# Altium PCB MAIN.PcbDoc
Units mil, origin at the board's own origin, x right, y up, seen from the top; angles counter-clockwise.
Board outline 3248.03 x 2755.91 mil, 2 copper layers (Top Layer, Bottom Layer); 64 components, 65 nets, 317 pads, 0 vias.
Unrouted connection lines stored in the file: 152.
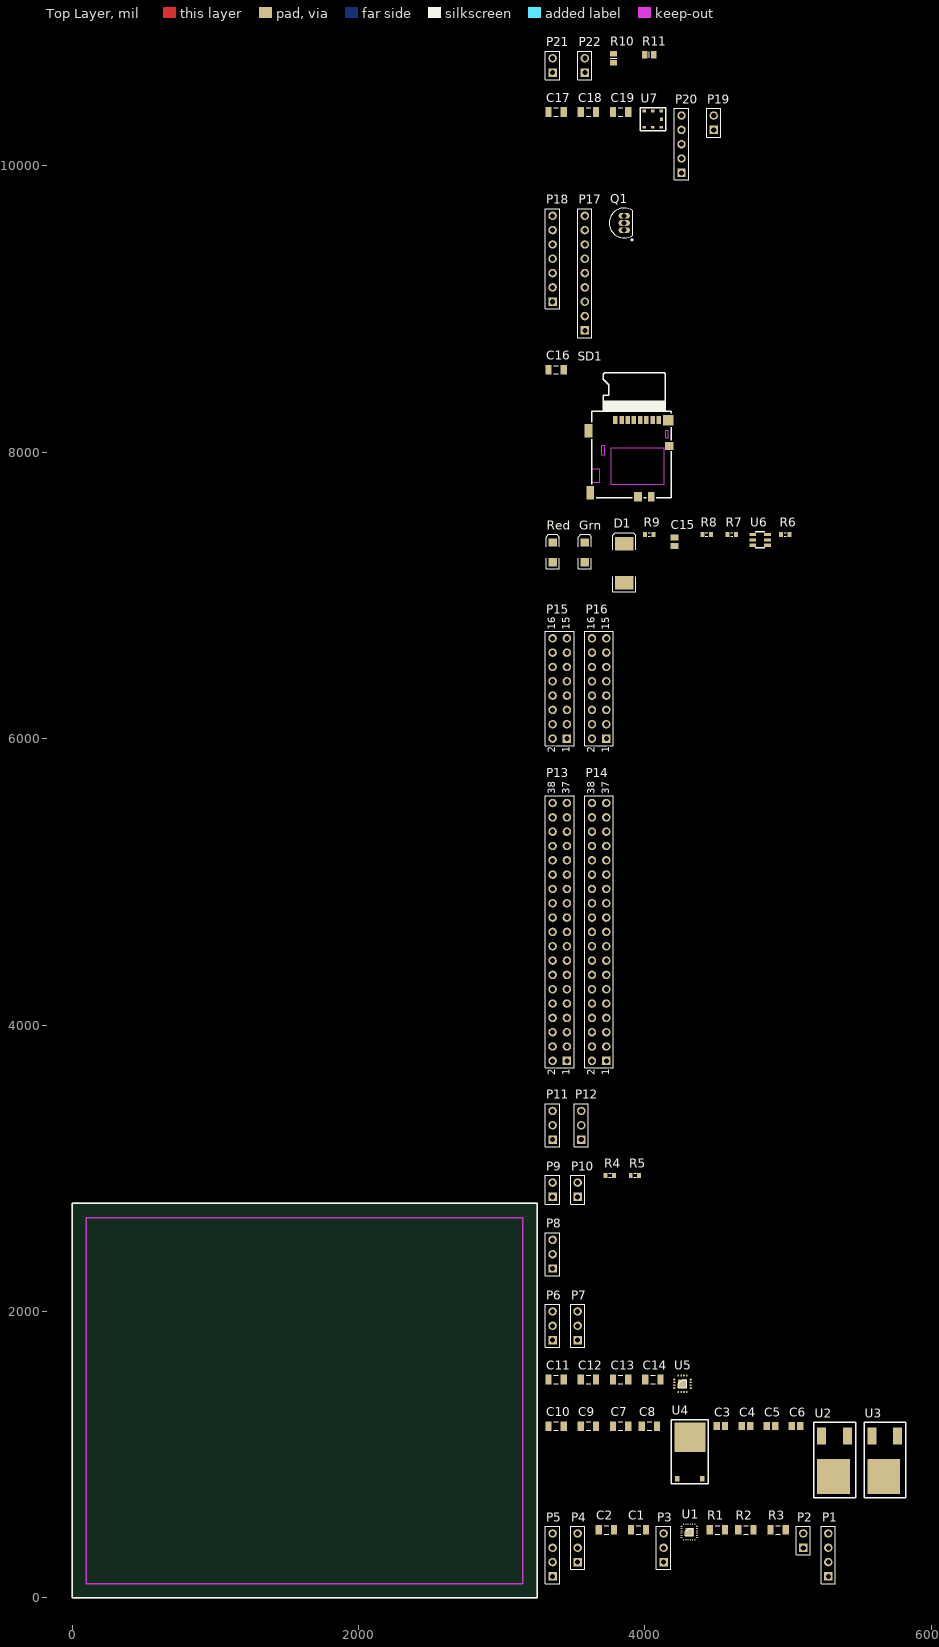
[diagram p0: Top Layer view]
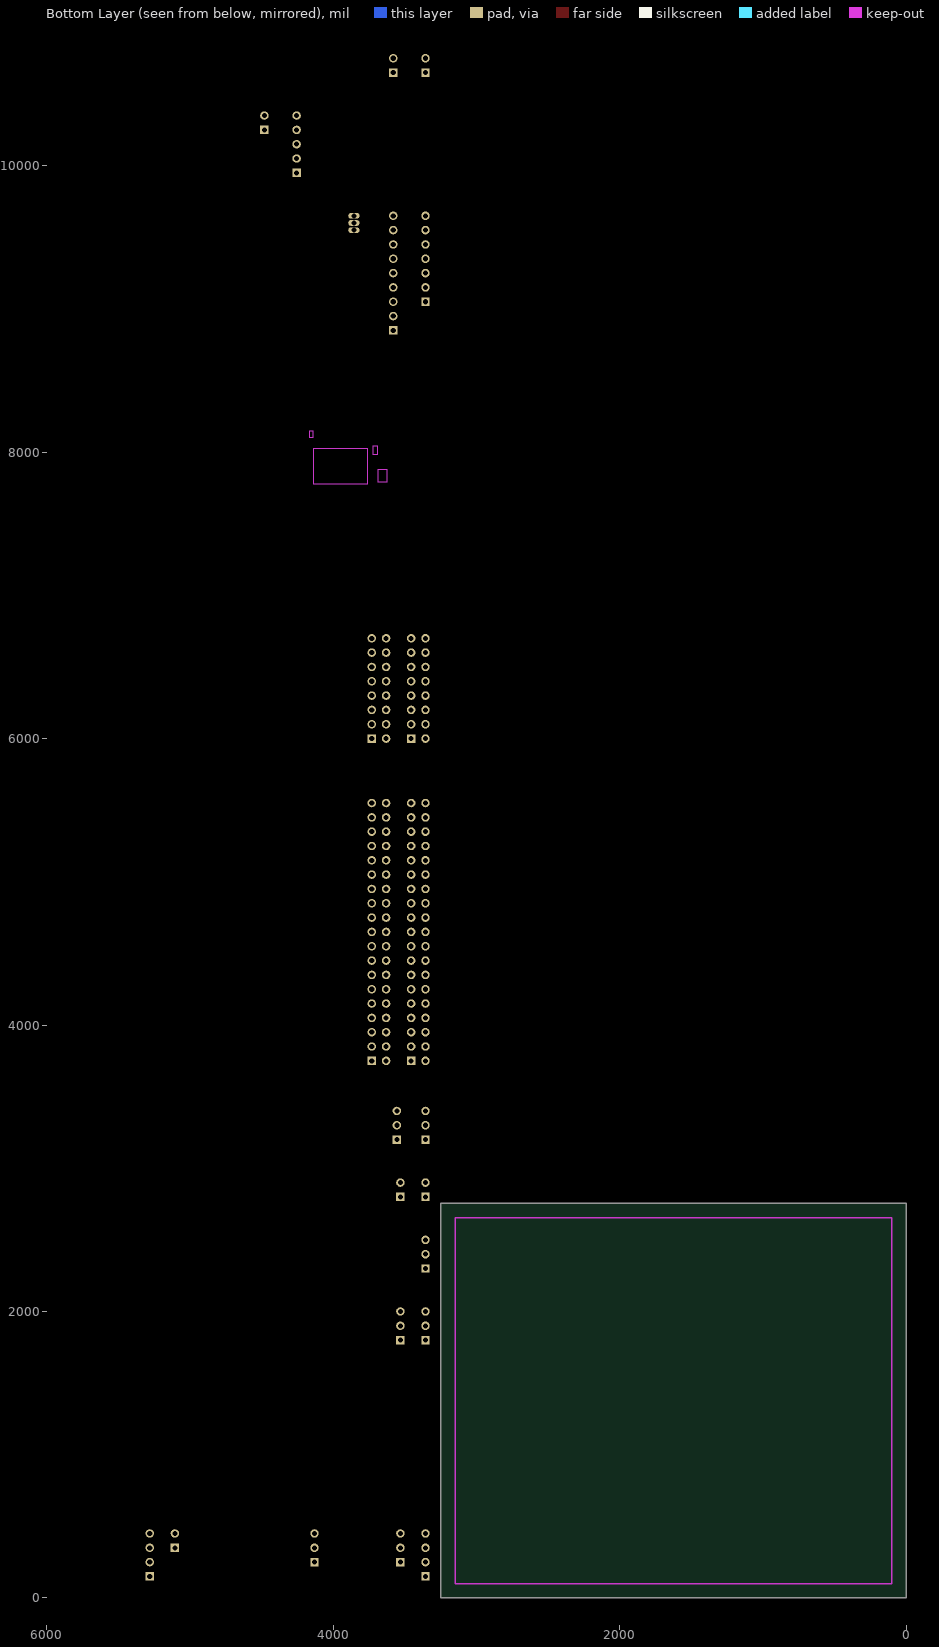
[diagram p1: Bottom Layer view, seen from below]

## Layer stack, top to bottom
Top Solder: solder mask 0.4, Solder Resist, Dk 3.5
Top Layer: signal copper 1.4
Dielectric1: dielectric 12.6, FR-4, Dk 4.8
Bottom Layer: signal copper 1.4
Bottom Solder: solder mask 0.4, Solder Resist, Dk 3.5

## Board outline
0,0 3248.03,0 3248.03,2755.91 0,2755.91

## Design rules (kind name [scope] priority, off if disabled: settings)
Clearance [All] p1: gap=10
PolygonConnect [All] p1: connectstyle=Relief reliefconductorwidth=10 reliefentries=4 polygonreliefangle="90 Angle" airgapwidth=10
RoomDefinition Thermistors [InComponentClass('Thermistors')] p1: confinementstyle=ConfineIn formatcopy=TRUE lockcomponents=FALSE outline 3280,10575 4130,10575 4130,10925 3280,10925
RoomDefinition Temp_Pressure [InComponentClass('Temp_Pressure')] p2: confinementstyle=ConfineIn formatcopy=TRUE lockcomponents=FALSE outline 3280,9875 4605,9875 4605,10525 3280,10525
RoomDefinition Telemetry-Power [InComponentClass('Telemetry-Power')] p3: confinementstyle=ConfineIn formatcopy=TRUE lockcomponents=FALSE outline 3280,8775 3930,8775 3930,9825 3280,9825
RoomDefinition RSX11_SDCard [InComponentClass('RSX11_SDCard')] p4: confinementstyle=ConfineIn formatcopy=TRUE lockcomponents=FALSE outline 3280,7600 4280,7600 4280,8725 3280,8725
RoomDefinition RS232_Level_Shifter [InComponentClass('RS232_Level_Shifter')] p5: confinementstyle=ConfineIn formatcopy=TRUE lockcomponents=FALSE outline 3280,7000 5080,7000 5080,7575 3280,7575
RoomDefinition OV7670s [InComponentClass('OV7670s')] p6: confinementstyle=ConfineIn formatcopy=TRUE lockcomponents=FALSE outline 3280,5875 3805,5875 3805,6950 3280,6950
RoomDefinition Nucleo [InComponentClass('Nucleo')] p7: confinementstyle=ConfineIn formatcopy=TRUE lockcomponents=FALSE outline 3280,3625 3805,3625 3805,5825 3280,5825
RoomDefinition Linear_Actuators [InComponentClass('Linear_Actuators')] p8: confinementstyle=ConfineIn formatcopy=TRUE lockcomponents=FALSE outline 3280,3125 3680,3125 3680,3575 3280,3575
RoomDefinition LEDs [InComponentClass('LEDs')] p9: confinementstyle=ConfineIn formatcopy=TRUE lockcomponents=FALSE outline 3280,2725 4030,2725 4030,3100 3280,3100
RoomDefinition Humidity_Sensor [InComponentClass('Humidity_Sensor')] p10: confinementstyle=ConfineIn formatcopy=TRUE lockcomponents=FALSE outline 3280,2225 3430,2225 3430,2675 3280,2675
RoomDefinition GoPros [InComponentClass('GoPros')] p11: confinementstyle=ConfineIn formatcopy=TRUE lockcomponents=FALSE outline 3280,1725 3605,1725 3605,2175 3280,2175
RoomDefinition enviroAccelerometer [InComponentClass('enviroAccelerometer')] p12: confinementstyle=ConfineIn formatcopy=TRUE lockcomponents=FALSE outline 3280,1400 4355,1400 4355,1675 3280,1675
RoomDefinition Buck_Converters [InComponentClass('Buck_Converters')] p13: confinementstyle=ConfineIn formatcopy=TRUE lockcomponents=FALSE outline 3280,675 5830,675 5830,1375 3280,1375
RoomDefinition BoomIMU_Sensor [InComponentClass('BoomIMU_Sensor')] p14: confinementstyle=ConfineIn formatcopy=TRUE lockcomponents=FALSE outline 3280,75 5355,75 5355,650 3280,650
RoutingVias [All] p1: holewidth=28 width=50 viastyle="Through Hole" minholewidth=28 minwidth=50 maxholewidth=28 maxwidth=50
SilkToSolderMaskClearance SilkscreenOverComponentPads [IsPad] p1: minsilkscreentomaskgap=10 clearancetoexposedcopper=TRUE
SolderMaskExpansion [All] p1: expansion=4
UnpouredPolygon [All] p1: allowunpoured=FALSE
Width [All] p1: maxlimit=10 minlimit=10 preferedwidth=10
28 further rules are at their usual default settings.

## Classes and differential pairs
component class Thermistors: P21 P22 R10 R11
component class Temp_Pressure: C17 C18 C19 P19 P20 U7
component class Telemetry-Power: P17 P18 Q1
component class RSX11_SDCard: C16 SD1
component class RS232_Level_Shifter: C15 D1 Grn R6 R7 R8 R9 Red U6
component class OV7670s: P15 P16
component class Nucleo: P13 P14
component class Linear_Actuators: P11 P12
component class LEDs: P9 P10 R4 R5
component class Humidity_Sensor: P8
component class GoPros: P6 P7
component class enviroAccelerometer: C11 C12 C13 C14 U5
component class Buck_Converters: C3 C4 C5 C6 C7 C8 C9 C10 U2 U3 U4
component class BoomIMU_Sensor: C1 C2 P1 P2 P3 P4 P5 R1 R2 R3 U1

## Components (designator, comment, footprint, x,y, rotation, side; value= is the part's Value field where it differs from the comment)
C1 "Cap" C1206 3955,475 r0 top
C2 "Cap" C1206 3730,475 r0 top
C3 "Cap" C0805 4530,1200 r0 top
C4 "Cap" C0805 4705,1200 r0 top
C5 "Cap" C0805 4880,1200 r0 top
C6 "Cap" C0805 5055,1200 r0 top
C7 "Cap Semi" C1206 3830,1200 r0 top
C8 "Cap Semi" C1206 4030,1200 r0 top
C9 "Cap Semi" C1206 3605,1200 r0 top
C10 "Cap Semi" C1206 3380,1200 r0 top
C11 "Cap Semi" C1206 3380,1525 r0 top
C12 "Cap Semi" C1206 3605,1525 r0 top
C13 "Cap Semi" C1206 3830,1525 r0 top
C14 "Cap Semi" C1206 4055,1525 r0 top
C15 "Cap Pol3" C0805 4205,7375 r90 top
C16 "Cap" C1206 3380,8575 r0 top
C17 "Cap Semi" C1206 3380,10375 r0 top
C18 "Cap Semi" C1206 3605,10375 r0 top
C19 "Cap Semi" C1206 3830,10375 r0 top
D1 "BAS16" SMC 3855,7225 r90 top
Grn "LED2" 3.2X1.6X1.1 3580,7300 r90 top
P1 "J1" HDR1X4 5280,150 r90 top
P2 "SJ1" HDR1X2 5105,350 r90 top
P3 "J2" HDR1X3 4130,250 r90 top
P4 "Header 3" HDR1X3 3530,250 r90 top
P5 "J3" HDR1X4 3355,150 r90 top
P6 "GoPro 1" HDR1X3 3355,1800 r90 top
P7 "GoPro 2" HDR1X3 3530,1800 r90 top
P8 "Header 3" HDR1X3 3355,2300 r90 top
P9 "LED_Ext" HDR1X2 3355,2800 r90 top
P10 "LED_Int" HDR1X2 3530,2800 r90 top
P11 "Front Actuator" HDR1X3 3355,3200 r90 top
P12 "Back Actuator" HDR1X3 3555,3200 r90 top
P13 "Nucleo LHS" HDR2X19 3455,3750 r90 top
P14 "Nucleo RHS" HDR2X19 3730,3750 r90 top
P15 "OV7670" HDR2X8 3455,6000 r90 top
P16 "OV7670" HDR2X8 3730,6000 r90 top
P17 "RS Telemetry" HDR1X9 3580,8850 r90 top
P18 "RS Power" HDR1X7 3355,9050 r90 top
P19 "Header 2" HDR1X2 4480,10250 r90 top
P20 "Temp-Press_CameraBox" HDR1X5 4255,9950 r90 top
P21 "Thermistor" HDR1X2 3355,10650 r90 top
P22 "Thermistor" HDR1X2 3580,10650 r90 top
Q1 "Transistor" TO-226-AA 3855,9600 r0 top
R1 "Res1" C1206 4505,475 r0 top
R2 "Res1" C1206 4705,475 r0 top
R3 "Res1" C1206 4930,475 r0 top
R4 "Res3" J1-0603 3755,2950 r0 top
R5 "Res3" J1-0603 3930,2950 r0 top
R6 "Res3" J1-0603 4980,7425 r0 top
R7 "Res3" J1-0603 4605,7425 r0 top
R8 "Res3" J1-0603 4430,7425 r0 top
R9 "Res3" J1-0603 4030,7425 r0 top
R10 "Res3" 6-0805_L 3780,10750 r90 top
R11 "Res3" 6-0805_L 4030,10775 r0 top
Red "LED2" 3.2X1.6X1.1 3355,7300 r90 top
SD1 "uSD-PJS008-2130-0" microSD_push-push 3880,8225 r90 top
U1 "MPU-9250" MPU-9250 4255,500 r0 top
U2 "DPAK-3" DPAK-3 5430,725 r90 top
U3 "DPAK-3" DPAK-3 5780,725 r90 top
U4 "REG_IFX" Reg_IFX 4205,1225 r0 top
U5 "ADXL377" ADXL377 4205,1525 r0 top
U6 "RS232" rs232 4855,7425 r0 top
U7 "BMP180" BMP180 4055,10325 r0 top

## Footprints (in the part's own frame and the unit in brackets; to place one, negate y for a bottom-side part, rotate by r counter-clockwise, add the part's x,y. Pads: shape width x height; smd on the part's side, far side on the other; paste and mask are expansions set on the pad)
3.2X1.6X1.1 [mm] "SMT LED; 2 Flat Leads"
  rect 1.5x1.5 smd: 1(-1.75,0) 2(1.75,0)
  silkscreen extent -2.9,-1.15 3.2,1.15
6-0805_L [mm] "Chip Resistor, Body 2.0x1.2mm, IPC High Density"
  rect 1x1.3 smd: 1(-0.8,0) 2(0.8,0)
  silkscreen extent 0,-0.55 0,0.55, body extent -1.07,-0.7 1.07,0.7, height 0.7
ADXL377 [mm]
  oval 0.4x0.3 smd: 1(0,0) 2(0,-0.5) 3(0,-1) 4(0,-1.5) 9(2.9,-1.5) 10(2.9,-1) 11(2.9,-0.5) 12(2.9,0)
  oval 0.3x0.4 smd: 5(0.7,-2.2) 6(1.2,-2.2) 7(1.7,-2.2) 8(2.2,-2.2) 13(2.2,0.7) 14(1.7,0.7) 15(1.2,0.7) 16(0.7,0.7)
  rect 1.524x1.524 smd: ""(1.45,-0.749)
  silkscreen extent 0.73,-1.46 2.16,-0.03
BMP180 [mm]
  rect 0.6x0.5 smd: 1(1.5,-1.45) 2(0,-1.45) 3(-1.55,-1.45) 4(-1.5,1.45) 5(0,1.45) 6(1.5,1.45)
  rect 0.5x0.6 smd: 7(1.55,0)
  silkscreen extent -2.25,-2.05 2.25,2
C0805 [mm] "Chip Capacitor, Body 2.0x1.3mm, IPC High Density"
  rect 1.1x1.4 smd: 1(-0.75,0) 2(0.75,0)
  body extent -1.1,-0.72 1.1,0.72, height 1.4
C1206 [mm] "Chip Capacitor, Body 3.2x1.6mm, IPC High Density"
  rect 1.1x1.7 smd: 1(-1.35,0) 2(1.35,0)
  silkscreen extent -0.4,-0.75 0.4,0.75, body extent -1.7,-0.9 1.7,0.9, height 1.3
DPAK-3 [mil]
  rect 118x63 smd: 1(405,16.5) 3(405,196.5)
  rect 244x228 smd: 2(122,114)
  silkscreen extent -25,-40 500,250
HDR1X2 [mm] "Connector; Header; 2 Position"
  rect 1.5x1.5 hole 0.9: 1(0,0)
  round 1.5 hole 0.9: 2(2.54,0)
  silkscreen extent -1.27,-1.27 3.81,1.27
HDR1X3 [mm] "Connector; Header; 3 Position"
  rect 1.5x1.5 hole 0.9: 1(0,0)
  round 1.5 hole 0.9: 2(2.54,0) 3(5.08,0)
  silkscreen extent -1.27,-1.27 6.35,1.27
HDR1X4 [mm] "Connector; Header; 4 Position"
  rect 1.5x1.5 hole 0.9: 1(0,0)
  round 1.5 hole 0.9: 2(2.54,0) 3(5.08,0) 4(7.62,0)
  silkscreen extent -1.27,-1.27 8.89,1.27
HDR1X5 [mm] "Connector; Header; 5 Position"
  rect 1.5x1.5 hole 0.9: 1(0,0)
  round 1.5 hole 0.9: 2(2.54,0) 3(5.08,0) 4(7.62,0) 5(10.16,0)
  silkscreen extent -1.27,-1.27 11.43,1.27
HDR1X7 [mm] "Connector; Header; 7 Position"
  rect 1.5x1.5 hole 0.9: 1(0,0)
  round 1.5 hole 0.9: 2(2.54,0) 3(5.08,0) 4(7.62,0) 5(10.16,0) 6(12.7,0) 7(15.24,0)
  silkscreen extent -1.27,-1.27 16.51,1.27
HDR1X9 [mm] "Connector; Header; 9 Position"
  rect 1.5x1.5 hole 0.9: 1(0,0)
  round 1.5 hole 0.9: 2(2.54,0) 3(5.08,0) 4(7.62,0) 5(10.16,0) 6(12.7,0) 7(15.24,0) 8(17.78,0) 9(20.32,0)
  silkscreen extent -1.27,-1.27 21.59,1.27
HDR2X8 [mm] "Connector; Header; 8x2 Position"
  rect 1.5x1.5 hole 0.9: 1(0,0)
  round 1.5 hole 0.9: 2(0,2.54) 3(2.54,0) 4(2.54,2.54) 5(5.08,0) 6(5.08,2.54) 7(7.62,0) 8(7.62,2.54) 9(10.16,0) 10(10.16,2.54) 11(12.7,0) 12(12.7,2.54) 13(15.24,0) 14(15.24,2.54) 15(17.78,0) 16(17.78,2.54)
  silkscreen extent -1.27,-1.27 19.05,3.81
HDR2X19 [mm] "Connector; Header; 19x2 Position"
  rect 1.5x1.5 hole 0.9: 1(0,0)
  round 1.5 hole 0.9: 2(0,2.54) 3(2.54,0) 4(2.54,2.54) 5(5.08,0) 6(5.08,2.54) 7(7.62,0) 8(7.62,2.54) 9(10.16,0) 10(10.16,2.54) 11(12.7,0) 12(12.7,2.54) 13(15.24,0) 14(15.24,2.54) 15(17.78,0) 16(17.78,2.54) 17(20.32,0) 18(20.32,2.54) 19(22.86,0) 20(22.86,2.54) 21(25.4,0) 22(25.4,2.54) 23(27.94,0) 24(27.94,2.54) 25(30.48,0) 26(30.48,2.54) 27(33.02,0) 28(33.02,2.54) 29(35.56,0) 30(35.56,2.54) 31(38.1,0) 32(38.1,2.54) 33(40.64,0) 34(40.64,2.54) 35(43.18,0) 36(43.18,2.54) 37(45.72,0) 38(45.72,2.54)
  silkscreen extent -1.27,-1.27 46.99,3.81
J1-0603 [mm] "Chip Resistor, Body 1.6x0.8mm, IPC High Density"
  rect 0.7x0.9 smd: 1(-0.75,0) 2(0.75,0)
  silkscreen extent -0.2,-0.35 0.2,0.35, body extent -0.85,-0.48 0.85,0.48, height 0.9
microSD_push-push [mm]
  rect 1.4x0.8 smd: 1(0,2.2) 2(0,1.1) 3(0,0) 4(0,-1.1) 5(0,-2.2) 6(0,-3.3) 7(0,-4.4) 8(0,-5.5)
  rect 1.72x1.4 smd: 9(-13.651,-1.8)
  rect 2.4x1.4 smd: 9(-12.901,6.65) 9(-1.9,6.95)
  rect 1.9x1.9 smd: 9(-0.05,-7.175)
  rect 1.4x1.5 smd: 10(-4.6,-7.375)
  rect 1.72x1.1 smd: 11(-13.651,-4.15)
  Keep-Out Layer region: -3.2,-7.15 -1.9,-7.15 -1.9,-6.65 -3.2,-6.65
  Keep-Out Layer region: -6.2,4.05 -4.6,4.05 -4.6,4.75 -6.2,4.75
  Keep-Out Layer region: -11.05,4.95 -8.75,4.95 -8.75,6.45 -11.05,6.45
  Keep-Out Layer region: -11.4,-6.45 -5,-6.45 -5,3.05 -11.4,3.05
  silkscreen extent -13.83,-7.67 8.35,6.43, body extent -13.85,-7.67 8.3,6.4, height 1.55
MPU-9250 [mm]
  oval 0.3x0.2 smd: 1(0,0) 2(0,-0.4) 3(0,-0.8) 4(0,-1.2) 5(0,-1.6) 6(0,-2) 13(2.746,-2) 14(2.746,-1.6) 15(2.746,-1.2) 16(2.746,-0.8) 17(2.746,-0.4) 18(2.746,0)
  oval 0.2x0.3 smd: 7(0.373,-2.373) 8(0.773,-2.373) 9(1.173,-2.373) 10(1.573,-2.373) 11(1.973,-2.373) 12(2.373,-2.373) 19(2.373,0.373) 20(1.973,0.373) 21(1.573,0.373) 22(1.173,0.373) 23(0.773,0.373) 24(0.373,0.373)
  rect 1.397x1.397 smd: ""(1.397,-1.016)
  silkscreen extent 0.68,-1.69 2.06,-0.31
Reg_IFX [mm]
  rect 0.76x1 smd: 1(0.525,-10) 3(4.975,-10)
  rect 5.5x5.25 smd: 2(2.75,-2.625)
  silkscreen extent -0.58,-10.87 6.02,0.45
rs232 [mil]
  rect 47.5x22 smd: 1(0,0) 2(0,-37.4) 3(0,-74.8) 4(-102.36,0) 5(-102.36,-37.4) 6(-102.36,-74.8)
  silkscreen extent -84,-92 -20,18
SMC [mm] "DO-214-AB/SMC; 2 C-Bend Leads; Body 7.9 x 5.9 mm, inc. leads (LxW)"
  rect 2.4x3.3 smd: 1(-3.475,0) 2(3.475,0)
  silkscreen extent -5.07,-2.05 5.43,2.05
TO-226-AA [mm] "TO, Flat Index; 3 In-Line, Axial Leads; Body Dia. 4.8mm; Leads 0.55 x 0.51 mm (max)"
  oval 2x1 hole 0.9: 1(0,-1.27) 2(0,0) 3(0,1.27)
  silkscreen extent -2.65,-3.13 1.52,2.65, body extent -2.66,-2.66 1.52,2.66, height 5.33

## Part data
C1 C2 C16: "Capacitor"
C3 C4 C5 C6: library part "Cap Pol3", "Polarized Capacitor (Surface Mount)"
C7 C8 C9 C10 C11 C12 C13 C14 C17 C18 C19: "Capacitor (Semiconductor SIM Model)"
C15: "Polarized Capacitor (Surface Mount)"
D1: library part Diode, "Default Diode"
Grn Red: "Typical RED, GREEN, YELLOW, AMBER GaAs LED"
P1 P5: library part "Header 4", "Header, 4-Pin"
P2 P9 P10 P21 P22: library part "Header 2", "Header, 2-Pin"
P3 P6 P7 P11 P12: library part "Header 3", "Header, 3-Pin"
P4 P8: "Header, 3-Pin"
P13 P14: library part "Header 19X2", "Header, 19-Pin, Dual row"
P15 P16: library part "Header 8X2", "Header, 8-Pin, Dual row"
P17: library part "Header 9", "Header, 9-Pin"
P18: library part "Header 7", "Header, 7-Pin"
P19: "Header, 2-Pin"
P20: library part "Header 5", "Header, 5-Pin"
Q1: library part NPN, "NPN Bipolar Transistor"
R1 R2 R3 R4 R5 R6 R7 R8 R9 R10 R11: "Resistor"
SD1: library part microSD_card_push-push, "RockOn 2016 SD card midification (part number PJS008-2130-0) -Jesse Austin"

## Nets (pads, with @x,y where several pads share a name; then routed paths per layer and width w, separated by ;. In a path a pad name is that pad's centre, name@x,y a point inside that pad or via, vN(x,y) a via of type N, cw(c..) or ccw(c..) an arc to the next point about the centre after c; other vN are vias at no path point)
AD0: P4.1 P5.2
AD0-GND: P4.2 U1.9
AUX_CL: P3.1 U1.7
AUX_DA: P3.3 U1.21
"CARD IN": SD1.11
CS: P5.3 R3.1 SD1.2 U1.22
D2: P15.16 P16.16
D3: P15.15 P16.15
D4: P15.14 P16.14
D5: P15.13 P16.13
D6: P15.12 P16.12
D7: P15.11 P16.11
D8: P15.10 P16.10
D9: P15.9 P16.9
DF_GND: C1.1 C2.1 C3.2 C4.2 C5.2 C6.2 C7.1 C8.1 C9.2 C11.2 C12.1 C13.1 C14.1 C15.1 C16.2 C17.1 C18.1 C19.1 P1.4 P4.3 P6.3 P7.3 P8.1 P9.2 P10.2 P11.3 P12.3 P13.8 P13.19 P13.20 P13.22 P14.9 P14.20 P15.2 P16.2 P18.4 P18.5 P18.6 P18.7 P20.3 P21.2 P22.2 SD1.6 SD1.9 SD1.10 U1.18 U2.2 U3.2 U4.1 U5.1 U5.3 U5.6 U5.7 U6.6 U7.7
FSYNC: P3.2 U1.11
HREF: P15.6 P16.6
INT: P5.4 U1.12
LIM_BACK: P12.1
LIM_FRONT: P11.1
MISO: SD1.7
MOSI: SD1.3
MPU-CAP: C2.2 U1.10
NetC9_1: C9.1 C10.2 U4.2
NetC15_2: C15.2 D1.1 R9.2
NetD1_2: D1.2 U6.5
NetGrn_1: Grn.1 R8.1
NetP9_1: P9.1 R4.1
NetP10_1: P10.1 R5.1
NetP21_1: P21.1 R10.1
NetP22_1: P22.1 R11.1
NetR7_1: R7.1 Red.1
NetR9_1: R9.1 U6.4
OUT: P8.2
PB1: P17.3
PB2: P17.4
PB3: P17.5
PCLK: P15.7 P16.7
RS232_DAT: P17.1
RS232_GND: P17.2
RS-OUT: R6.2 U6.1
RX: Red.2 U6.2
SCK: SD1.5
SCL: P1.1 P15.3 P16.3 P20.4 R2.1 U1.23 U7.5
SDA: P1.2 P20.5 R1.1 U1.24 U7.6
SDA\: P15.4 P16.4
ST: U5.2
TE2: P18.2
TE3: P18.3
TRIG: P6.2 P7.2
TX: Grn.2
VCC: P8.3 R7.2 R8.2
VCC5: R6.1 U6.3
VDD3.3: C1.2 C10.1 C11.1 C16.1 C17.2 C18.2 P1.3 P2.1 P15.1 P16.1 P19.1 P20.2 R4.2 R5.2 R10.2 R11.2 SD1.4 U1.13 U5.14 U5.15 U7.2
VDD5: C6.1 U3.3
VDD5V: P6.1 P7.1
VDD12: C4.1 P13.26 U2.3
VDD12V: P11.2 P12.2
VDDIO: C19.2 P2.2 P5.1 P19.2 P20.1 R1.2 R2.2 R3.2 U1.1 U7.3
VIN30: C3.1 C5.1 C7.2 C8.2 P18.1 U2.1 U3.1 U4.3
VSYNC: P15.5 P16.5
X_ENV: C12.2 U5.5
XCLK: P15.8 P16.8
Y_ENV: C13.2 U5.4
Z_ENV: C14.2 U5.16
pads on no net: P13.1 P13.2 P13.3 P13.4 P13.5 P13.6 P13.7 P13.9 P13.10 P13.11 P13.12 P13.13 P13.14 P13.15 P13.16 P13.17 P13.18 P13.21 P13.23 P13.24 P13.25 P13.27 P13.28 P13.29 P13.30 P13.31 P13.32 P13.33 P13.34 P13.35 P13.36 P13.37 P13.38 P14.1 P14.2 P14.3 P14.4 P14.5 P14.6 P14.7 P14.8 P14.10 P14.11 P14.12 P14.13 P14.14 P14.15 P14.16 P14.17 P14.18 P14.19 P14.21 P14.22 P14.23 P14.24 P14.25 P14.26 P14.27 P14.28 P14.29 P14.30 P14.31 P14.32 P14.33 P14.34 P14.35 P14.36 P14.37 P14.38 P17.6 P17.7 P17.8 P17.9 Q1.1 Q1.2 Q1.3 SD1.1 SD1.8 U1. U1.2 U1.3 U1.4 U1.5 U1.6 U1.8 U1.14 U1.15 U1.16 U1.17 U1.19 U1.20 U5. U5.8 U5.9 U5.10 U5.11 U5.12 U5.13 U7.1 U7.4

## Keep-outs
Keep-Out Layer:
  lines w10: 100,100 100,2655.9 3148.03,2655.9 3148.03,100 100,100

## Silkscreen, mask and mechanical layers (free items; w line width, h text height)
Top Overlay:
  the board outline again, w10
  text "ROCKETSAT-11" at -800,2675 h50
  text "REX-B" at -625,2600 h50
  text "Main Board Rev 1" at -900,2525 h50
  text "Z. Asmussen" at -800,2475 h25
  text "L. Hutchinson" at -475,2475 h25
  text "J. Grunwald" at -800,2425 h25
  text "V. Nystrom" at -475,2425 h25
  text "N. Ferguson" at -800,2375 h25
  text "Z. Toelkes" at -475,2375 h25

## Text inside footprints (layer, text, board x,y; h text height)
P13: Top Overlay "2" at 3375,3650 h50 r90; Top Overlay "1" at 3475,3650 h50 r90; Top Overlay "37" at 3475,5610 h50 r90; Top Overlay "38" at 3375,5610 h50 r90
P14: Top Overlay "2" at 3650,3650 h50 r90; Top Overlay "1" at 3750,3650 h50 r90; Top Overlay "37" at 3750,5610 h50 r90; Top Overlay "38" at 3650,5610 h50 r90
P15: Top Overlay "2" at 3375,5900 h50 r90; Top Overlay "1" at 3475,5900 h50 r90; Top Overlay "15" at 3475,6760 h50 r90; Top Overlay "16" at 3375,6760 h50 r90
P16: Top Overlay "2" at 3650,5900 h50 r90; Top Overlay "1" at 3750,5900 h50 r90; Top Overlay "15" at 3750,6760 h50 r90; Top Overlay "16" at 3650,6760 h50 r90